# EAGLE board Luxeon_Turn (EAGLE 6.4)
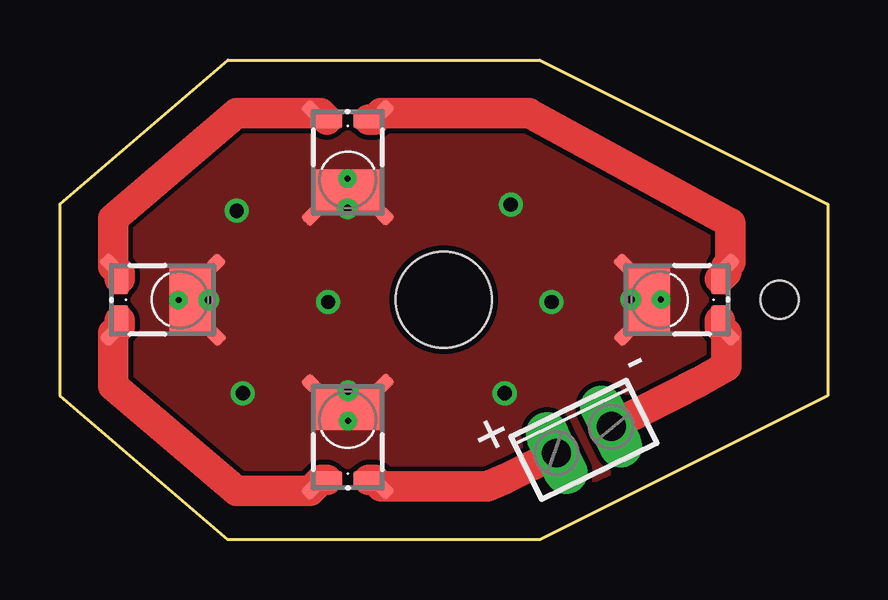
[diagram p0: board, top side]
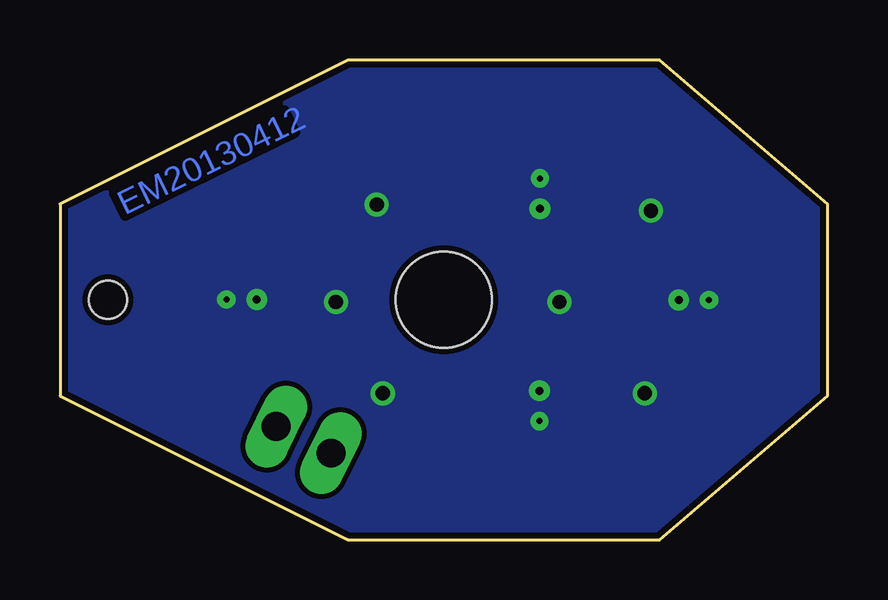
[diagram p1: board, bottom side, seen from below]

Size 32 x 20 mm. Coordinates in mm from the lower left corner, seen from the top.
Outline: 7,0 0,6 0,14 7,20 20,20 32,14 32,6 20,0 7,0
Copper layers (1*16): Top 0.035mm / dielectric 1.5mm / Bottom 0.035mm
Design rules "default *": minimum track width 10mil, minimum drill 24mil, track to track 8mil, track to pad 8mil, pad to pad 8mil, via to via 8mil, smd to smd 8mil, copper to edge 10mil, drill to drill 10mil, minimum pad ring 10mil, minimum via ring 8mil, stop-mask expansion 4mil, vias tented up to drill 0mil, thermal gap 10mil
Holes 4 mm at 16,10
Holes 1.59 mm at 30,10

## Footprints (pad centres in the part's own frame; a part is rotated, then mirrored left to right if it is on the bottom)
LUXEON_REBEL = smd 1.26 x 0.73: A 0.87,-2.51; C -0.87,-2.51 | smd 1.1 x 0.57 rotated 315: A@1 1.39,-2.78 | smd 1.1 x 0.57 rotated 225: C@1 -1.39,-2.79 | smd 2.86 x 1.83: TH 0.01,0.49 | smd 1.1 x 0.57 rotated 135: TH@1 -1.39,1.37 | smd 1.1 x 0.57 rotated 45: TH@2 1.39,1.38 | drill 0.25 pad 0.35: TH@3 0.01,-0.06 | drill 0.35 pad 0.5: TH@4 0.01,1.2
2POL254 = drill 1.2 long: 1 -1.27,0; 2 1.27,0

## Placement (x,y rotation side)
LED1  LUXEON_REBEL  [LUXEON_REBEL]  25,10 90 top
LED2  LUXEON_REBEL  [LUXEON_REBEL]  12,15 180 top
LED3  LUXEON_REBEL  [LUXEON_REBEL]  5,10 270 top
LED4  LUXEON_REBEL  [LUXEON_REBEL]  12,5 0 top
X1  [2POL254]  21.84,4.16 26 top

## Library data of the parts
LED1-LED4 = led
X1 = con-phoenix-254; OC_FARNELL: unknown; OC_NEWARK: unknown

## Nets
N$2: LED1.A LED1.A@1 LED2.C LED2.C@1
N$3: LED2.A LED2.A@1 LED3.C LED3.C@1
N$4: LED3.A LED3.A@1 LED4.C LED4.C@1
THERMAL: LED1.TH LED1.TH@1 LED1.TH@2 LED1.TH@3 LED1.TH@4 LED2.TH LED2.TH@1 LED2.TH@2 LED2.TH@3 LED2.TH@4 LED3.TH LED3.TH@1 LED3.TH@2 LED3.TH@3 LED3.TH@4 LED4.TH LED4.TH@1 LED4.TH@2 LED4.TH@3 LED4.TH@4
V+: LED4.A LED4.A@1 X1.1
V-: LED1.C LED1.C@1 X1.2

## Tracks (layer width: path | path; a pad name or v marks a point on that pad's centre or on a via)
N$2
  Top 1.27: LED2.C 13.11,17.51 LED2.C@1 19.55,17.79 19.56,17.78 27.94,13.21 27.94,11.55 LED1.A@1 27.78,11.14 LED1.A
N$3
  Top 1.27: LED3.C 2.49,11.11 LED3.C@1 2.21,13.39 7.37,17.78 LED2.A@1 10.86,17.78 LED2.A
N$4
  Top 1.27: LED4.C 10.89,2.49 LED4.C@1 10.43,2.03 7.37,2.03 2.22,6.42 LED3.A@1 2.49,8.88 LED3.A
THERMAL  (via drill 0.6)
  other vias: 7.37,13.72 18.8,13.97 11.18,9.91 7.62,6.1 20.49,9.91 18.54,6.1
  pour Top: 2.03,7.11 2.03,13.46 7.37,18.54 20.07,18.54 29.72,12.95 29.72,6.1 19.81,1.27 7.62,1.02
  pour Bottom: -1.02,5.33 -1.02,14.73 6.6,21.34 20.32,21.34 33.27,14.99 33.27,5.59 20.32,-1.02 6.6,-1.02
V+
  Top 1.27: LED4.A 13.12,2.49 LED4.A@1 17.82,2.22 18.54,2.54 X1.1
V-
  Top 1.27: LED1.C 27.51,8.89 LED1.C@1 27.79,7.22 26.67,6.6 X1.2

## Text on the board
Bottom: EM20130412
tPlace: - | +